# Altium PCB DE-010824.PcbDoc (part 2 of 2)
Units mil, origin at the board's own origin, x right, y up, seen from the top; angles counter-clockwise.
Board outline 4921.26 x 2755.91 mil, 3 copper layers (Top Layer, PWR, Bottom Layer), stack 19.217 mil thick; 221 components, 143 nets, 583 pads, 126 vias.
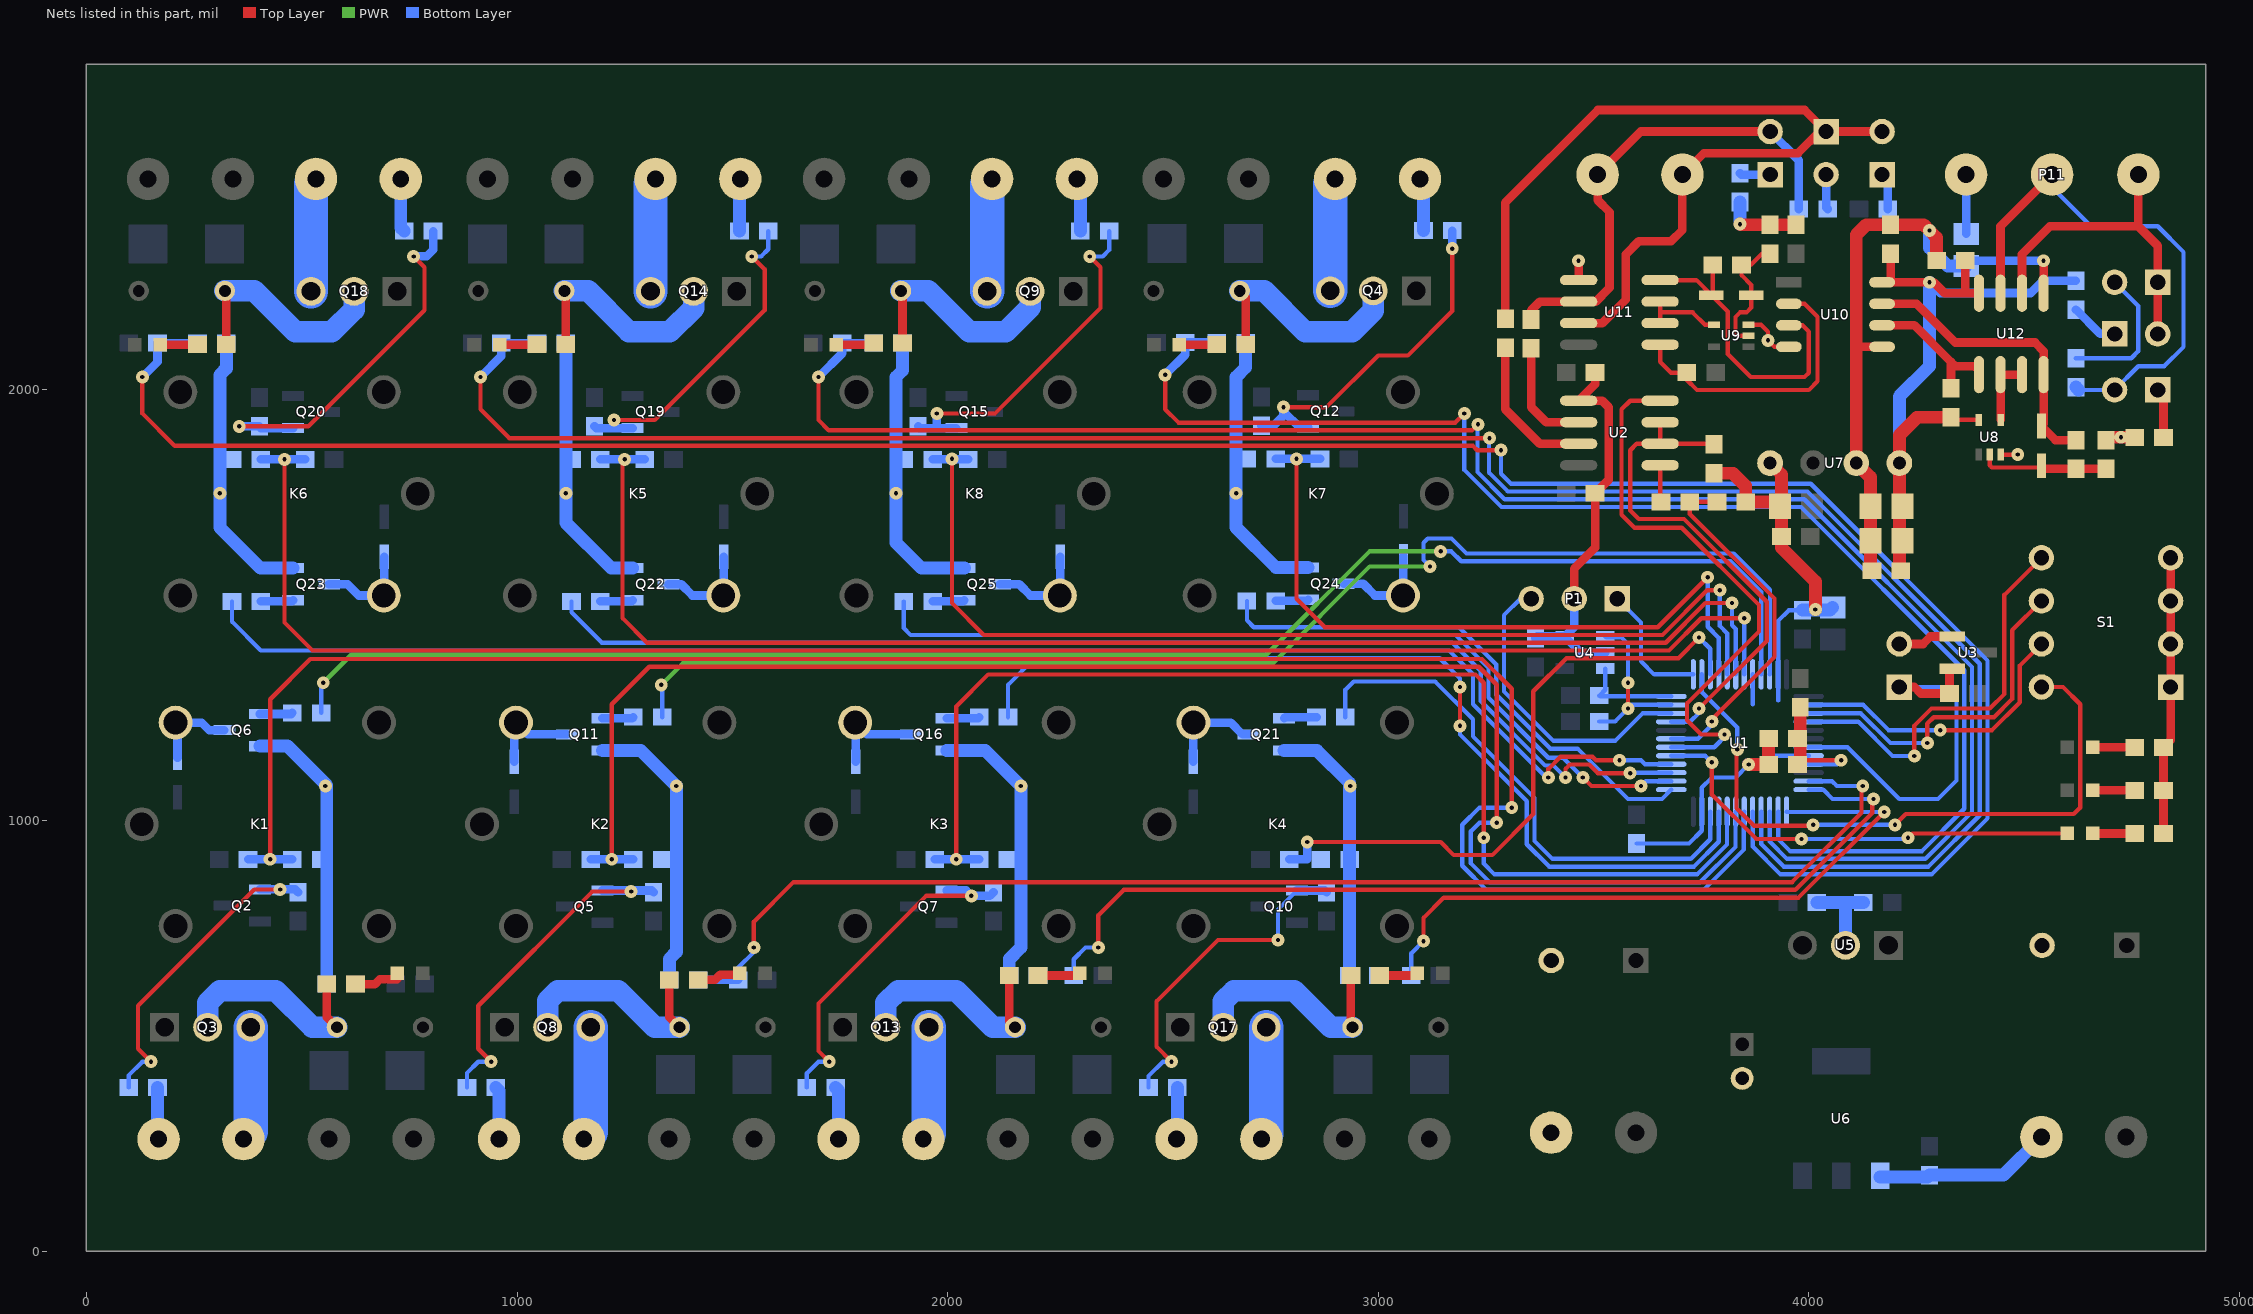
[diagram p3: the nets of this part, all layers, seen from the top]

## Via types
v1: diameter 30, hole 10, Top Layer to Bottom Layer, 126 vias

## Nets (pads, with @x,y where several pads share a name; then routed paths per layer and width w, separated by ;. In a path a pad name is that pad's centre, name@x,y a point inside that pad or via, vN(x,y) a via of type N, cw(c..) or ccw(c..) an arc to the next point about the centre after c; other vN are vias at no path point) (continued)
FB_DOOR_1: R35.2 R38.2 U1.11 | length 3113.5
  Top Layer w10: v1@1550,695 v1(1550,705) 1550,765 1642,857 3961.09,857 4122,1017.91 4122,1077 v1(4125,1080)
  Bottom Layer w10: R35.2@1513.68,630 1513.68,658.68 v1@1550,695 ; U1.11@3999.45,1091.42 4053.58,1091.42 4065,1080 v1(4125,1080)
  Bottom Layer w20: R38.2@1420.61,630 R35.2@1513.68,630
FB_DOOR_2: R44.2 R46.2 U1.12 | length 2352.9
  Top Layer w10: v1(2350,705) 2350,780 2409,839 3968.54,839 4147,1017.46 4147,1047 v1(4150,1050)
  Bottom Layer w10: R44.2@2293.07,640 2293.07,678.07 2320,705 v1(2350,705) ; U1.12@3999.45,1071.73 4033.27,1071.73 4055,1050 v1(4150,1050)
  Bottom Layer w20: R46.2@2210,640 R44.2@2293.07,640
FB_DOOR_3: R50.2 R53.2 U1.13 | length 1621.2
  Top Layer w10: v1(3105,720) 3105,774 3152,821 3976,821 v1(4175,1020)
  Bottom Layer w10: R50.2@3076.54,640 3076.54,691.54 v1(3105,720) ; U1.13@3948.27,1020.55 3948.82,1020 v1(4175,1020)
  Bottom Layer w20: R53.2@3000,640 R50.2@3076.54,640
FB_DOOR_4: R59.2 R61.2 U1.14 | length 3318.6
  Top Layer w10: v1(2505,2035) 2505,1955 2536,1924 3179,1924 v1(3200,1945)
  Bottom Layer w10: v1(3200,1945) 3200,1814.03 3286.03,1728 3982,1728 4361,1349 4361,1027.37 4262.63,929 3956.46,929 3928.58,956.87 U1.14@3928.58,1020.55
  Bottom Layer w20: v1(2505,2035) 2551.89,2081.89 R59.2@2551.89,2110 R61.2@2624.96,2110
FB_DOOR_5: R65.2 R70.2 U1.15 | length 4210.8
  Top Layer w10: v1(1700,2030) 1700,1930 1724,1906 3217.67,1906 v1(3231.67,1920) v1@3235,1920
  Bottom Layer w10: v1(3231.67,1920) 3230.33,1918.67 3230.33,1809.16 3293.49,1746 3989.46,1746 4379,1356.46 4379,1019.91 4270.09,911 3949,911 3908.9,951.1 U1.15@3908.9,1020.55
  Bottom Layer w20: v1(1700,2030) 1755.04,2085.04 R65.2@1755.04,2108.78 R70.2@1828.11,2108.78
FB_DOOR_6: R74.2 R76.2 U1.16 | length 5037.8
  Top Layer w10: v1(915,2030) 915,1955 982,1888 v1@3258,1888
  Bottom Layer w10: v1(3258.33,1888) 3257,1886.67 3257,1807.95 3300.95,1764 3996.91,1764 4397,1363.91 4397,1012.46 4277.54,893 3941.54,893 3889.21,945.33 U1.16@3889.21,1020.55
  Bottom Layer w20: v1(915,2030) 963.46,2078.46 R74.2@963.46,2108.78 R76.2@1046.54,2108.78
FB_DOOR_7: R80.2 R83.2 U1.17 | length 5899.4
  Top Layer w10: v1(130,2030) 130,1945 205,1870 3220,1870 3230,1860 v1(3285,1860)
  Bottom Layer w10: v1(3285,1860) 3285,1805.4 3308.4,1782 4004.37,1782 4415,1371.37 4415,1005 4285,875 3934.09,875 3869.53,939.56 U1.17@3869.53,1020.55
  Bottom Layer w20: v1(130,2030) 165.04,2065.04 R80.2@165.04,2108.78 R83.2@258.11,2108.78
FB_RD_0: R26.2 R28.2 U1.18 | length 4731.7
  Top Layer w10: v1(426.76,910) 426.76,1281.76 520,1375 3240.91,1375 3310,1305.91 v1(3310,1030)
  Bottom Layer w10: v1(3310,1030) 3235,1030 3195,990 3195,895 3251,839 3755.37,839 3849.06,932.7 3849.06,1019.77 U1.18@3849.84,1020.55
  Bottom Layer w20: R26.2@375.42,910 v1(426.76,910) R28.2@478.11,910
FB_RD_1: R34.2 R37.2 U1.19 | length 3779.3
  Top Layer w10: v1(1220,910) 1220,1270 1307,1357 3233.46,1357 3275,1315.46 v1(3275,995)
  Bottom Layer w10: v1(3275,995) 3235,995 3215,975 3215,900.46 3258.46,857 3747.91,857 3829.38,938.47 3829.38,1019.77 U1.19@3830.16,1020.55
  Bottom Layer w20: R34.2@1170.99,910 v1(1220,910) R37.2@1270.22,910
FB_RD_2: R43.2 R45.2 U1.20 | length 2821.6
  Top Layer w10: v1(2020,910) 2020,1265 2094,1339 3226,1339 3245,1320 v1(3245,960)
  Bottom Layer w10: v1(3245,960) 3245,900 3270,875 3740.46,875 3809.69,944.24 3809.69,1019.77 U1.20@3810.47,1020.55
  Bottom Layer w20: R43.2@1970.38,910 v1(2020,910) R45.2@2073.07,910
FB_RD_3: R49.2 R52.2 U1.39 | length 1476.5
  Top Layer w10: v1(2835,950) 3145,950 3175,920 3265,920 3360,1015 3360,1300 3437,1377 3697,1377 v1(3745,1425)
  Bottom Layer w10: v1(3745,1425) 3771.1,1398.9 U1.39@3771.1,1339.45
  Bottom Layer w20: R49.2@2793.46,910 2835,910 v1(2835,950)
FB_RD_4: R58.2 R60.2 U1.40 | length 1694.3
  Top Layer w10: v1(2810,1840) 2810,1515 2876,1449 3649,1449 v1(3765,1565)
  Bottom Layer w10: v1(3765,1565) 3765,1450 3790.79,1424.21 U1.40@3790.79,1339.45
  Bottom Layer w20: R60.2@2761.89,1840 v1(2810,1840) R58.2@2864.58,1840
FB_RD_5: R64.2 R69.2 U1.41 | length 2477.8
  Top Layer w10: v1(2010,1840) 2010,1505 2084,1431 3660.09,1431 3764.09,1535 v1(3793.33,1535)
  Bottom Layer w10: v1(3793.33,1535) 3793.33,1451.67 3810.47,1434.53 U1.41@3810.47,1339.45
  Bottom Layer w20: R69.2@1965.04,1838.78 R64.2@2048.11,1838.78
FB_RD_6: R73.2 R75.2 U1.42 | length 3281.4
  Top Layer w10: v1(1250,1838.78) 1245,1833.78 1245,1470 1302,1413 3667.54,1413 3759.54,1505 v1(3821.67,1505)
  Bottom Layer w10: v1(3821.67,1505) 3821.67,1453.33 3830.16,1444.84 U1.42@3830.16,1339.45
  Bottom Layer w20: R75.2@1193.46,1838.78 v1(1250,1838.78) R73.2@1296.54,1838.78
FB_RD_7: R79.2 R82.2 U1.43 | length 4060
  Top Layer w10: v1(460,1838.78) 460,1460 525,1395 3675,1395 3749.84,1469.84 v1@3849.84,1469.84
  Bottom Layer w10: U1.43@3849.84,1339.45 v1@3849.84,1469.84
  Bottom Layer w20: R82.2@405.04,1838.78 v1(460,1838.78) R79.2@508.11,1838.78
  other v1: 3850,1470
I2C_SCL: R11.1 U1.35 U4.1 | length 393
  Top Layer w10: v1(3580,1260) v1(3580,1320)
  Bottom Layer w10: R11.1@3513.46,1230 3550,1230 v1(3580,1260) 3588.58,1268.58 U1.35@3680.55,1268.58 ; U4.1@3527.24,1427.4 3529.65,1425 3565,1425 3580,1410 v1(3580,1320)
I2C_SDA: R12.1 U1.36 U4.3 | length 236.1
  Bottom Layer w10: U4.3@3527.24,1352.6 3527.24,1303.78 R12.1@3513.46,1290 3515.2,1288.27 U1.36@3680.55,1288.27
NetC11_1: C11.1 C12.1 L1.2 U1.9 | length 311.6
  Top Layer w10: C12.1@3973.46,1130 3980,1136.54 3983.46,1140 v1(4075,1140)
  Top Layer w30: C12.1@3980,1136.54 L1.2@3980,1263.07
  Bottom Layer w10: U1.9@3999.45,1130.79 4065.79,1130.79 v1(4075,1140)
NetC22_2: C22.2 D5.2 R17.1 U9.2 | length 303
  Top Layer w10: U9.2@3860,2125.59 3834.41,2125.59 3829.46,2130.54 3829.46,2169.46 3840,2180 3855,2180 3866.26,2191.26 D5.2@3866.26,2220 3866.26,2243.74 3843.46,2266.54 R17.1@3843.46,2290 3865,2290 3891.54,2316.54 C22.2@3910,2316.54
NetC23_2: C23.2 D6.2 R18.1 U8.2 | length 301.3
  Top Layer w10: U8.2@4420,1849.65 4420,1825 4425,1820 4536.26,1820 D6.2@4540,1823.74
  Top Layer w20: D6.2@4540,1823.74 4547.2,1816.54 C23.2@4690,1816.54
NetD1_2: D1.2 R1.2 | length 97
  Top Layer w20: D1.2@4659.53,970 R1.2@4756.54,970
NetD2_2: D2.2 R2.2 | length 97
  Top Layer w20: D2.2@4659.53,1070 R2.2@4756.54,1070
NetD3_2: D3.2 R4.2 | length 97
  Top Layer w20: D3.2@4659.53,1170 R4.2@4756.54,1170
NetD5_1: D5.1 R17.2 U10.3 U11.4 | length 719.6
  Top Layer w10: U11.4@3654.49,2255 3738.74,2255 D5.1@3773.74,2220 ; R17.2@3776.54,2290 3776.54,2222.8 D5.1@3773.74,2220 ; U10.3@3953.46,2150 3985,2150 4000,2135 4000,2040 3990,2030 3865,2030 3811.46,2083.54 3811.46,2182.28 D5.1@3773.74,2220
NetD6_1: D6.1 R18.2 U10.7 U12.4 | length 690
  Top Layer w20: U10.7@4170,2200 4250,2200 4340,2110 4525,2110 4545,2090 U12.4@4545,2035.51 4545,1921.26 D6.1@4540,1916.26 4572.8,1883.46 R18.2@4620,1883.46
NetD7_2: D7.2 R30.1 | length 101.9
  Top Layer w20: R30.1@625.04,620 670,620 681.75,631.75 D7.2@722.05,631.75
NetD9_2: D9.2 R31.1 | length 87
  Top Layer w20: D9.2@2537.95,2105 R31.1@2624.96,2105
NetD11_2: D11.2 K1.5 Q6.3 | length 203.3
  Bottom Layer w20: D11.2@211.57,1146.26 211.57,1223 K1.5@207.13,1227.44 267.56,1227.44 285,1210 Q6.3@320.24,1210
NetD12_2: D12.2 R41.1 | length 101.9
  Top Layer w20: R41.1@1420.61,630 1460,630 1471.75,641.75 D12.2@1517.62,641.75
NetD14_2: D14.2 R42.1 | length 88.6
  Top Layer w20: D14.2@1741.1,2105 1824.33,2105 R42.1@1828.11,2108.78
NetD16_2: D16.2 K2.5 Q11.3 | length 222.4
  Bottom Layer w20: D16.2@993.69,1136.26 993.69,1223.61 K2.5@997.52,1227.44 1024.96,1200 Q11.3@1115.81,1200
NetD17_2: D17.2 R54.1 | length 99.1
  Top Layer w20: R54.1@2210,640 2302.01,640 D17.2@2307.01,645
NetD19_2: D19.2 R55.1 | length 87
  Top Layer w20: D19.2@959.53,2105 R55.1@1046.54,2105
NetD21_2: D21.2 K3.5 Q16.3 | length 231.2
  Bottom Layer w20: K3.5@1785.28,1227.44 K3.5@1786.54,1226.18 ; D21.2@1786.54,1136.26 K3.5@1786.54,1226.18 ; Q16.3@1915.2,1200 1812.72,1200 K3.5@1786.54,1226.18
NetD22_2: D22.2 R67.1 | length 89.1
  Top Layer w20: R67.1@3003.46,640 3085.47,640 D22.2@3090.47,645
NetD24_2: D24.2 R68.1 | length 87
  Top Layer w20: D24.2@171.1,2105 R68.1@258.11,2105
NetD26_2: D26.2 K4.5 Q21.3 | length 230.7
  Bottom Layer w20: D26.2@2570,1136.26 2570,1226.5 K4.5@2570.94,1227.44 2657.56,1227.44 2685,1200 Q21.3@2698.66,1200
NetD27_2: D27.2 K5.5 Q22.3 | length 228.9
  Bottom Layer w20: Q22.3@1351.34,1548.78 1381.22,1548.78 1407.44,1522.56 K5.5@1479.06,1522.56 1480,1523.5 D27.2@1480,1612.52
NetD28_2: D28.2 K6.5 Q23.3 | length 228.9
  Bottom Layer w20: Q23.3@562.91,1548.78 606.22,1548.78 632.44,1522.56 K6.5@690.63,1522.56 691.57,1523.5 D28.2@691.57,1612.52
NetD29_2: D29.2 K7.5 Q24.3 | length 240.7
  Bottom Layer w20: Q24.3@2919.76,1550 2965,1550 2992.44,1522.56 K7.5@3057.48,1522.56 3058.43,1523.5 D29.2@3058.43,1613.74
NetD30_2: D30.2 K8.5 Q25.3 | length 240.3
  Bottom Layer w20: Q25.3@2121.57,1548.78 2166.22,1548.78 2192.44,1522.56 K8.5@2260.63,1522.56 2261.57,1523.5 D30.2@2261.57,1612.52
NetF1_1: F1.1 Q3.2 R30.2 | length 513.3
  Top Layer w20: R30.2@558.11,620 558.11,543.46 F1.1@581.57,520
  Bottom Layer w50: Q3.2@281.57,520 281.57,576.57 310,605 440,605 525,520 F1.1@581.57,520
NetF2_1: F2.1 Q4.2 R31.2 | length 546.6
  Top Layer w20: F2.1@2678.43,2230 2691.89,2216.54 R31.2@2691.89,2105
  Bottom Layer w50: F2.1@2678.43,2230 2735,2230 2830,2135 2940,2135 2988.43,2183.43 Q4.2@2988.43,2230
NetF3_1: F3.1 Q8.2 R41.2 | length 532
  Top Layer w20: R41.2@1353.68,630 1353.68,543.46 F3.1@1377.15,520
  Bottom Layer w50: Q8.2@1071.15,520 1071.15,581.15 1095,605 1235,605 1320,520 F3.1@1377.15,520
NetF4_1: F4.1 Q9.2 R42.2 | length 522.6
  Top Layer w20: F4.1@1891.57,2230 1895.04,2226.54 R42.2@1895.04,2108.78
  Bottom Layer w50: F4.1@1891.57,2230 1955,2230 2050,2135 2135,2135 2191.57,2191.57 Q9.2@2191.57,2228.78
NetF5_1: F5.1 Q13.2 R54.2 | length 529.1
  Top Layer w20: R54.2@2143.07,640 2143.07,533.46 F5.1@2156.54,520
  Bottom Layer w50: Q13.2@1856.54,520 1856.54,576.54 1885,605 2020,605 2105,520 F5.1@2156.54,520
NetF6_1: F6.1 Q14.2 R55.2 | length 527.3
  Top Layer w20: F6.1@1110,2230 1113.46,2226.54 R55.2@1113.46,2105
  Bottom Layer w50: F6.1@1110,2230 1165,2230 1260,2135 1355,2135 1410,2190 Q14.2@1410,2228.78
NetF7_1: F7.1 Q17.2 R67.2 | length 527
  Top Layer w20: R67.2@2936.54,640 2936.54,523.46 F7.1@2940,520
  Bottom Layer w50: Q17.2@2640,520 2640,580 2665,605 2805,605 2890,520 F7.1@2940,520
NetF8_1: F8.1 Q18.2 R68.2 | length 529.4
  Top Layer w10: F8.1@321.57,2230 F8.1@325.04,2226.54
  Top Layer w20: R68.2@325.04,2105 F8.1@325.04,2226.54
  Bottom Layer w50: F8.1@321.57,2230 390,2230 485,2135 570,2135 621.57,2186.57 Q18.2@621.57,2228.78
NetP3_1: P3.1 R9.1 U1.7 U3.2 | length 927.6
  Top Layer w20: P3.1@4210,1310 4245,1310 4260,1295 R9.1@4326.54,1295 4326.54,1346.54 U3.2@4332.6,1352.6
  Bottom Layer w10: U1.7@3999.45,1170.16 4089.84,1170.16 4210,1050 4300,1050 4343,1093 4343,1282 4315,1310 P3.1@4210,1310
NetP5_1: P5.1 R13.1 | length 113.4
  Bottom Layer w20: R13.1@4620,2186.54 4676.54,2130 P5.1@4710,2130
NetP5_2: P5.2 P9.1 P11.1 U12.6 | length 776.1
  Top Layer w20: U12.6@4495,2224.49 4495,2315 4560,2380 4765,2380 ; P11.1@4765,2500 4765,2380 ; P5.2@4810,2130 P9.1@4810,2250 4810,2335 4765,2380
NetP6_1: P6.1 R14.1 | length 85.6
  Bottom Layer w20: P6.1@4170,2500 4183.46,2486.54 R14.1@4183.46,2420
NetP7_1: P7.1 R15.1 | length 115.6
  Top Layer w20: P7.1@4810,2000 4823.46,1986.54 R15.1@4823.46,1890
NetP7_2: P7.2 P11.2 R19.1 U12.7 | length 1236.5
  Top Layer w20: U12.7@4445,2224.49 4445,2380 P11.2@4565,2500
  Bottom Layer w10: P11.2@4565,2500 4565,2470 4655,2380 4810,2380 4870,2320 4870,2100 4825,2055 4765,2055 P7.2@4710,2000 R19.1@4626.54,2000
  Bottom Layer w30: R19.1@4620,2006.54 R19.1@4626.54,2000
NetP8_1: P8.1 R16.1 | length 71.4
  Bottom Layer w20: R16.1@3840,2503.46 3843.46,2500 P8.1@3910,2500
NetP9_2: P9.2 R19.2 | length 334.6
  Bottom Layer w10: R19.2@4620,2073.46 4748.46,2073.46 4765,2090 4765,2195 P9.2@4710,2250
NetP10_2: P10.2 R20.2 | length 81.4
  Bottom Layer w20: P10.2@4040,2500 4040,2423.46 R20.2@4043.46,2420
NetP11_3: P11.3 R23.2 | length 137.6
  Bottom Layer w20: R23.2@4365,2362.4 P11.3@4365,2500
NetQ2_1: Q2.1 R24.1 R25.2 | length 768.8
  Top Layer w10: v1(150,440) 120,470 120,570 390,840 v1(450,840)
  Bottom Layer w10: R25.2@98.11,380 98.11,408.11 130,440 v1(150,440)
  Bottom Layer w20: Q2.1@402.91,840 v1(450,840) 485.04,840 R24.1@491.57,833.46
NetQ5_1: Q5.1 R32.1 R33.2 | length 828.4
  Top Layer w10: v1(940,440) 910,470 910,570 1175,835 v1(1265,835)
  Bottom Layer w10: R33.2@883.68,380 883.68,413.68 910,440 v1(940,440)
  Bottom Layer w20: Q5.1@1198.49,837.4 1313.21,837.4 R32.1@1317.15,833.46
NetQ6_1: Q6.1 R36.1 | length 76.3
  Bottom Layer w20: Q6.1@402.91,1247.4 475.51,1247.4 R36.1@478.11,1250
NetQ7_1: Q7.1 R39.1 R40.2 | length 817.4
  Top Layer w10: v1(1725,440) 1700,465 1700,575 1950,825 v1(2055,825)
  Bottom Layer w10: R40.2@1673.07,380 1673.07,413.07 1700,440 v1(1725,440)
  Bottom Layer w20: Q7.1@1997.87,837.4 2042.6,837.4 v1(2055,825) 2098.07,825 R39.1@2106.54,833.46
NetQ10_1: Q10.1 R47.1 R48.2 | length 792.9
  Top Layer w10: v1(2520,440) 2485,475 2485,580 2627.75,722.75 v1(2767.25,722.75)
  Bottom Layer w10: R48.2@2466.54,380 2466.54,406.54 2500,440 v1(2520,440) ; v1(2767.25,722.75) 2767.25,793.32 Q10.1@2811.34,837.4
  Bottom Layer w20: Q10.1@2811.34,837.4 2876.06,837.4 R47.1@2880,833.46
NetQ11_1: Q11.1 R51.1 | length 72.8
  Bottom Layer w20: Q11.1@1198.49,1237.4 1267.62,1237.4 R51.1@1270.22,1240
NetQ12_1: Q12.1 R56.1 R57.2 | length 825.1
  Top Layer w10: v1(2780,1960) 2880,1960 3000,2080 3068.78,2080 3171.89,2183.11 v1(3171.89,2328.11)
  Bottom Layer w20: R56.1@2728.43,1916.54 2756.54,1916.54 2780,1940 v1@2780,1950 ; v1(2780,1960) v1@2780,1950 ; Q12.1@2837.09,1912.6 2817.4,1912.6 v1@2780,1950 ; v1(3171.89,2328.11) R57.2@3171.89,2370
NetQ15_1: Q15.1 R62.1 R63.2 | length 830.8
  Top Layer w10: v1(1975,1945) 2110,1945 2355,2190 2355,2285 v1(2330,2310)
  Bottom Layer w10: v1(2330,2310) 2360,2310 2375.04,2325.04 R63.2@2375.04,2368.78
  Bottom Layer w20: R62.1@1931.57,1915.32 1935.51,1911.38 1975,1911.38 ; v1(1975,1945) 1975,1911.38 ; Q15.1@2020.24,1911.38 1975,1911.38
NetQ16_1: Q16.1 R66.1 | length 76.3
  Bottom Layer w20: Q16.1@1997.87,1237.4 2070.47,1237.4 R66.1@2073.07,1240
NetQ19_1: Q19.1 R71.1 R72.2 | length 789.5
  Top Layer w10: v1(1225,1930) 1320,1930 1575,2185 1575,2280 v1(1545,2310)
  Bottom Layer w10: v1(1545,2310) 1566.93,2310 1583.46,2326.54 R72.2@1583.46,2368.78
  Bottom Layer w20: R71.1@1180,1915.32 1183.94,1911.38 1225,1911.38 ; v1(1225,1930) 1225,1911.38 ; Q19.1@1268.66,1911.38 1225,1911.38
NetQ20_1: Q20.1 R77.1 R78.2 | length 898.9
  Top Layer w10: v1(355,1915.32) 515.32,1915.32 785,2185 785,2285 v1(760,2310)
  Bottom Layer w20: v1(355,1915.32) R77.1@401.57,1915.32 405.51,1911.38 Q20.1@480.24,1911.38 ; v1(760,2310) 790,2310 805.04,2325.04 R78.2@805.04,2368.78
NetQ21_1: Q21.1 R81.1 | length 76.3
  Bottom Layer w20: Q21.1@2781.34,1237.4 2783.94,1240 R81.1@2856.54,1240
NetQ22_1: Q22.1 R84.1 | length 76.3
  Bottom Layer w20: R84.1@1193.46,1508.78 1266.06,1508.78 Q22.1@1268.66,1511.38
NetQ23_1: Q23.1 R85.1 | length 76.3
  Bottom Layer w20: R85.1@405.04,1508.78 477.64,1508.78 Q23.1@480.24,1511.38
NetQ24_1: Q24.1 R86.1 | length 76.3
  Bottom Layer w20: R86.1@2761.89,1510 2834.49,1510 Q24.1@2837.09,1512.6
NetQ25_1: Q25.1 R87.1 | length 74.9
  Bottom Layer w20: R87.1@1965.04,1508.78 2036.3,1508.78 Q25.1@2038.9,1511.38
NetR5_2: R5.2 U2.6 | length 261.5
  Top Layer w20: R5.2@3355,2096.54 3355,1960 3390,1925 U2.6@3465.51,1925
NetR6_2: R6.2 U2.7 | length 346.7
  Top Layer w20: R6.2@3295,2098.07 3295,1955 3375,1875 U2.7@3465.51,1875
NetR7_2: R7.2 U2.1 | length 85.8
  Top Layer w10: U2.1@3654.49,1825 3654.49,1742.05 R7.2@3656.54,1740
NetR21_1: R21.1 U10.2 U11.1 | length 679.1
  Top Layer w10: U11.1@3654.49,2105 3654.49,2065.51 3680,2040 R21.1@3716.54,2040 3716.54,2023.46 3740,2000 4000,2000 4020,2020 4020,2170 3990,2200 U10.2@3953.46,2200
NetR22_1: R22.1 U10.6 U12.1 | length 339.5
  Top Layer w20: U10.6@4170,2150 4245,2150 4330,2065 ; R22.1@4330,2003.46 4330,2065 ; U12.1@4395,2035.51 4395,2045 4385,2055 4340,2055 4330,2065
NetS1_5: S1.5 U1.4 | length 939.9
  Top Layer w10: v1(4245,1150) 4245,1220.46 4284.54,1260 4420,1260 4454,1294 4454,1524 S1.5@4540,1610
  Bottom Layer w10: U1.4@3999.45,1229.21 4114.88,1229.21 4194.09,1150 v1(4245,1150)
NetS1_6: S1.6 U1.3 | length 830.9
  Top Layer w10: v1(4275,1180) 4275,1225 4290,1240 4430,1240 4472,1282 4472,1442 S1.6@4540,1510
  Bottom Layer w10: U1.3@3999.45,1248.9 4120.65,1248.9 4189.54,1180 v1(4275,1180) v1@4280,1180
NetS1_7: S1.7 U1.2 | length 692.7
  Top Layer w10: v1(4305,1210) 4425.46,1210 4490,1274.54 4490,1360 S1.7@4540,1410
  Bottom Layer w10: U1.2@3999.45,1268.58 4126.42,1268.58 4185,1210 v1@4300,1210
NetS1_8: S1.8 U1.38 | length 1524.5
  Top Layer w10: v1(3833.75,1165) 3832,1163.25 3832,1028.46 3872.46,988 4008,988 v1(4010,990) ; v1(4200,990) 4225,1015 4615,1015 4630,1030 4630,1270 4590,1310 S1.8@4540,1310
  Bottom Layer w10: U1.38@3751.42,1339.45 3751.42,1298.58 3833.75,1216.25 v1(3833.75,1165) ; v1(4010,990) v1(4200,990)
NetU8_4: U8.4 U12.2 U12.3 | length 155.4
  Top Layer w20: U8.4@4445.59,1930.35 4445.59,2034.92 U12.2@4445,2035.51 U12.3@4495,2035.51
NetU9_4: U9.4 U11.2 U11.3 | length 186.7
  Top Layer w10: U11.2@3654.49,2155 3654.49,2180 ; U11.3@3654.49,2205 3654.49,2180 ; U9.4@3779.29,2151.18 3758.82,2151.18 3730,2180 3654.49,2180
PWR_0: R36.2 U1.45 | length 3768
  PWR w10: v1(550,1320) 615,1385 2740,1385 2980,1625 v1(3145,1625)
  Bottom Layer w10: R36.2@545.04,1250 545.04,1315.04 v1(550,1320) ; v1(3145,1625) 3169.54,1625 3192.54,1602 3818,1602 3889.21,1530.79 U1.45@3889.21,1339.45
PWR_1: R51.2 U1.46 | length 3092.1
  PWR w10: v1(1335,1315) 1385,1365 2755,1365 2980,1590 v1(3120,1590)
  Bottom Layer w10: R51.2@1337.15,1240 v1@1337.15,1317.15 ; v1(3120,1590) 3105,1605 3105,1645 3115,1655 3170,1655 3205,1620 3825.46,1620 3909.68,1535.78 3909.68,1340.23 U1.46@3908.9,1339.45
PWR_2: R66.2 U1.21 | length 2181.5
  Top Layer w10: v1(3190,1220) v1(3190,1310)
  Bottom Layer w10: R66.2@2140,1240 2140,1315 2202,1377 3143,1377 3190,1330 v1(3190,1310) ; v1(3190,1220) 3190,1200 3345,1045 3345,945 3397,893 3733,893 3790.79,950.79 U1.21@3790.79,1020.55 U1.21@3790.01,1019.77
PWR_3: R81.2 U1.22 | length 1254.5
  Bottom Layer w10: R81.2@2923.46,1240 2923.46,1303.46 2943,1323 3132,1323 3220,1235 3220,1195.46 3363,1052.46 3363,952.46 3404.46,911 3725.54,911 3771.1,956.56 U1.22@3771.1,1020.55
PWR_4: R86.2 U1.25 | length 1252.5
  Bottom Layer w10: R86.2@2694.96,1510 2694.96,1465.04 2711,1449 3187.36,1449 3274,1362.36 3274,1292.37 3399.37,1167 3463,1167 3580,1050 3658.82,1050 U1.25@3680.55,1071.73
PWR_5: R87.2 U1.26 | length 2041.8
  Top Layer w10: v1(3475,1100) 3495,1080 v1(3610,1080)
  Bottom Layer w10: R87.2@1898.11,1508.78 1898.11,1446.89 1914,1431 3179.51,1431 3256,1354.51 3256,1284.91 3394.91,1146 3429,1146 v1(3475,1100) ; v1(3610,1080) 3621.42,1091.42 U1.26@3680.55,1091.42
PWR_6: R84.2 U1.27 | length 2811.8
  Top Layer w10: v1(3435,1100) 3435,1120 3445,1130 3490,1130 3510,1110 v1(3585,1110)
  Bottom Layer w10: R84.2@1126.54,1508.78 1126.54,1483.46 1197,1413 3172.05,1413 3238,1347.05 3238,1277.46 3387.46,1128 3406.6,1128 3434.6,1100 v1(3435,1100) ; v1(3585,1110) 3586.1,1111.1 U1.27@3680.55,1111.1
PWR_7: R85.2 U1.28 | length 3618.7
  Top Layer w10: v1(3395,1100) 3395,1120 3423,1148 3497.46,1148 3505.46,1140 v1(3560,1140)
  Bottom Layer w10: R85.2@338.11,1508.78 338.11,1461.89 405,1395 3164.6,1395 3220,1339.6 3220,1270 3390,1100 v1(3395,1100) ; v1(3560,1140) 3610,1140 3619.21,1130.79 U1.28@3680.55,1130.79
RD_0: P14.2 R25.1 | length 125
  Bottom Layer w20: R25.1@165.04,380 R25.1@167.76,377.28
  Bottom Layer w30: R25.1@165.04,380 165.04,262.72 P14.2@167.76,260
RD_1: P16.2 R33.1 | length 123.1
  Bottom Layer w30: R33.1@950.61,380 958.15,372.46 P16.2@958.15,260
RD_2: P18.2 R40.1 | length 122.7
  Bottom Layer w30: R40.1@1740,380 1746.54,373.46 P18.2@1746.54,260
RD_3: P20.2 R48.1 | length 120.8
  Bottom Layer w30: P20.2@2531.57,260 2533.46,261.89 R48.1@2533.46,380
RD_4: P22.2 R57.1 | length 123.4
  Bottom Layer w30: P22.2@3096.85,2490 3104.96,2481.89 R57.1@3104.96,2370
RD_5: P24.2 R63.1 | length 124.6
  Bottom Layer w30: P24.2@2300,2490 2308.11,2481.89 R63.1@2308.11,2368.78
RD_6: P26.2 R72.1 | length 122
  Bottom Layer w30: R72.1@1516.54,2368.78 1516.54,2488.11 P26.2@1518.43,2490
RD_7: P28.2 R78.1 | length 124.6
  Bottom Layer w30: P28.2@730,2490 730,2376.89 R78.1@738.11,2368.78
RS485_DE: R3.2 U1.33 U2.2 U2.3 | length 1192.8
  Top Layer w10: U2.3@3654.49,1925 U2.2@3654.49,1875 ; v1(3745,1260) 3902,1417 3902,1508 3710,1700 3605,1700 3585,1720 3585,1860 3600,1875 U2.2@3654.49,1875 ; R3.2@3780,1873.46 3778.46,1875 U2.2@3654.49,1875
  Bottom Layer w10: U1.33@3680.55,1229.21 3724.21,1229.21 3745,1250 v1(3745,1260)
RSA: P8.2 P12.2 R5.1 R20.1 U11.6 | length 1149
  Top Layer w20: R5.1@3355,2163.46 3355,2185 3375,2205 U11.6@3465.51,2205 3505,2205 3537,2237 3537,2413 3509.49,2440.51 P12.2@3509.49,2500 3609.49,2600 P8.2@3910,2600
  Bottom Layer w20: P8.2@3910,2600 3976.54,2533.46 R20.1@3976.54,2420
RSB: P6.2 P10.1 P12.1 R6.1 U11.7 | length 2150.5
  Top Layer w20: R6.1@3295,2165 3295,2435 3510,2650 3990,2650 P10.1@4040,2600 ; U11.7@3465.51,2155 3520,2155 3575,2210 3575,2315 3605,2345 3680,2345 3706.34,2371.34 P12.1@3706.34,2500 3756.34,2550 3975,2550 4025,2600 P10.1@4040,2600 ; P6.2@4170,2600 P10.1@4040,2600
STATUS_LED: D1.1 U1.29 | length 1049.1
  Top Layer w10: v1(3774.58,1135) 3774.58,1060.42 3878,957 v1(3983,957) ; v1(4230,960) 4240,970 D1.1@4600.47,970
  Bottom Layer w10: U1.29@3680.55,1150.47 3759.11,1150.47 v1(3774.58,1135) ; v1(3983,957) 4227,957 v1(4230,960)
SWCLK: P1.1 U1.37 | length 302.2
  Bottom Layer w10: P1.1@3555,1515 3610,1460 3610,1370 3640.55,1339.45 U1.37@3731.73,1339.45
SWDIO: P1.3 U1.34 | length 718.5
  Bottom Layer w10: P1.3@3355,1515 3330,1515 3292,1477 3292,1299.82 3406.82,1185 3550,1185 3613.9,1248.9 U1.34@3680.55,1248.9
USART_RX: R7.1 R8.1 U1.31 | length 830
  Top Layer w10: v1@3782.5,1230 3782.5,1242.5 3920,1380 3920,1515.46 3723.46,1711.99 R7.1@3723.46,1740 R8.1@3786.54,1740
  Bottom Layer w10: U1.31@3680.55,1189.84 3742.34,1189.84 v1@3782.5,1230
  other v1: 3774.58,1230
USART_TX: U1.30 U2.4 | length 1333.7
  Top Layer w10: U2.4@3654.49,1975 3585,1975 3565,1955 3565,1710 3595,1680 3704.54,1680 3884,1500.54 3884,1439 3717,1272 3717,1233 3750,1200 v1(3804.17,1200) v1@3810,1200
  Bottom Layer w10: U1.30@3680.55,1170.16 3780.16,1170.16 v1@3810,1200
VDD2: C15.2 C16.2 C17.2 C20.2 C21.1 R13.2 R22.2 U7.4 U8.5 U10.8 U12.8 | length 1712.1
  Top Layer w10: R22.2@4330,1936.54 4336.18,1930.35 U8.5@4394.41,1930.35
  Top Layer w20: U10.8@4170,2250 U10.8@4185,2250 ; C20.2@4190,2316.54 4190,2255 U10.8@4185,2250 ; C21.1@4363.46,2300 4363.46,2226.02 4365,2224.49 ; U12.8@4395,2224.49 4365,2224.49 ; U10.8@4185,2250 v1(4280,2250) 4290,2250 4315.51,2224.49 4365,2224.49
  Top Layer w30: C17.2@4213.46,1580 4210,1583.46 4210,1730 U7.4@4210,1830 4210,1895 4251.54,1936.54 R22.2@4330,1936.54
  Bottom Layer w20: v1(4280,2250) 4305,2225 4515,2225 4543.46,2253.46 R13.2@4620,2253.46
  Bottom Layer w30: U7.4@4210,1830 4210,1985 4280,2055 v1(4280,2250)
VSS: C1.2 C2.2 C3.2 C4.2 C5.1 C6.1 C7.1 C8.1 C9.2 C10.2 C11.2 C12.2 C13.1 C14.1 C18.2 C19.1 C22.1 C24.1 P1.2 P2.1 P3.2 P4.1 P14.1 P16.1 P18.1 P20.1 P22.1 P24.1 P26.1 P28.1 Q3.3 Q4.3 Q6.2 Q8.3 Q9.3 Q11.2 Q13.3 Q14.3 Q16.2 Q17.3 Q18.3 Q21.2 Q22.2 Q23.2 Q24.2 Q25.2 R1.1 R2.1 R3.1 R4.1 R8.2 R16.2 R28.1 R29.1 R37.1 R38.1 R45.1 R46.1 R52.1 R53.1 R60.1 R61.1 R69.1 R70.1 R75.1 R76.1 R82.1 R83.1 S1.1 S1.2 S1.3 S1.4 U1.8 U1.23 U1.44 U1.47 U2.5 U3.1 U4.2 U4.5 U5.2 U6.1 U7.1 U9.3 U10.4 U11.5 | length 11525.1
  Top Layer w10: U9.3@3860,2151.18 3888.82,2151.18 3905,2135 v1(3905,2115) 3920,2100 U10.4@3953.46,2100
  Top Layer w20: P1.2@3455,1515 3455,1585 3503.46,1633.46 C1.2@3503.46,1760 3535,1791.54 3535,1960 3520,1975 U2.5@3465.51,1975 3503.46,2012.95 C18.2@3503.46,2040 ; v1(3465,2300) 3465.51,2299.49 U11.5@3465.51,2255 ; P3.2@4210,1410 4265,1410 4282.4,1427.4 U3.1@4332.6,1427.4 ; R1.1@4823.46,970 R2.1@4823.46,1070 R4.1@4823.46,1170 4840,1186.54 S1.1@4840,1310 S1.2@4840,1410 S1.3@4840,1510 S1.4@4840,1610
  Top Layer w30: R3.1@3780,1806.54 3823.46,1806.54 3853.46,1776.54 R8.2@3853.46,1740 3922.6,1740 C13.1@3932.6,1730 ; v1(3840,2385) 3841.54,2383.46 C22.1@3910,2383.46 C19.1@3970,2383.46 ; v1(3860,1130) C12.2@3906.54,1130 C11.2@3906.54,1190 ; U7.1@3910,1830 3936.54,1803.46 C14.1@3936.54,1660 3936.54,1633.46 4015,1555 v1(4015,1490)
  Bottom Layer w10: C10.2@3600,946.54 3721.54,946.54 3751.42,976.42 U1.23@3751.42,1020.55 3751.42,1076.42 3775,1100 3830,1100 v1(3860,1130) v1@3860,1140.47 ; 3869.53,1270 U1.44@3869.53,1339.45 ; 3920.47,1150.47 U1.8@3999.45,1150.47 ; 3928.58,1278.58 U1.47@3928.58,1339.45 3928.58,1463.58 3953.46,1488.46 C9.2@3985,1488.46
  Bottom Layer w20: C24.1@3365,1423.46 3368.94,1427.4 U4.5@3432.76,1427.4 ; P1.2@3455,1515 3455,1449.65 U4.5@3432.76,1427.4 ; U4.2@3527.24,1390 3470.16,1390 U4.5@3432.76,1427.4
  Bottom Layer w30: R83.1@325.04,2108.78 325.04,2050.04 310,2035 v1(310,1760) 310,1680 403.82,1586.18 Q23.2@480.24,1586.18 ; Q6.2@402.91,1172.6 467.4,1172.6 558.11,1081.89 R29.1@558.11,620 ; R76.1@1113.46,2108.78 v1(1113.46,1760) 1113.46,1691.54 1218.82,1586.18 Q22.2@1268.66,1586.18 ; Q11.2@1198.49,1162.6 1287.4,1162.6 v1(1370,1080) 1370,695 1353.69,678.69 R38.1@1353.69,630 ; R70.1@1895.04,2108.78 1895.04,2045.04 1880,2030 v1(1880,1760) 1880,1645 1938.82,1586.18 Q25.2@2038.9,1586.18 ; Q16.2@1997.87,1162.6 2087.4,1162.6 v1(2170,1080) 2170,705 2143.07,678.07 R46.1@2143.07,640 ; R61.1@2691.89,2110 2691.89,2051.89 2670,2030 v1(2670,1760) 2670,1680 2762.6,1587.4 Q24.2@2837.09,1587.4 ; Q21.2@2781.34,1162.6 2857.4,1162.6 2933.07,1086.93 R53.1@2933.07,640 ; v1(3840,2385) R16.2@3840,2436.54 ; C9.2@3985,1488.46 4048.66,1488.46 C8.1@4055,1494.8 ; C6.1@4018.46,810 4085,810 ; U5.2@4085,710 4085,810 ; C5.1@4126.54,810 4085,810 ; U6.1@4165.55,172.13 4275.59,172.13 C7.1@4280,176.54 4451.54,176.54 P4.1@4540,265
  Bottom Layer w50: P14.1@364.61,260 P14.1@381.57,276.96
  Bottom Layer w80: P14.1@381.57,276.96 Q3.3@381.57,520 ; Q18.3@521.57,2228.78 521.57,2478.43 P28.1@533.15,2490 ; P16.1@1155,260 1171.15,276.15 Q8.3@1171.15,520 ; Q14.3@1310,2228.78 1310,2478.43 P26.1@1321.57,2490 ; P18.1@1943.39,260 1956.54,273.15 Q13.3@1956.54,520 ; Q9.3@2091.57,2228.78 2091.57,2478.43 P24.1@2103.15,2490 ; P20.1@2728.43,260 2740,271.57 Q17.3@2740,520 ; Q4.3@2888.43,2230 2888.43,2478.43 P22.1@2900,2490
  other v1: 555,1080 2935,1080
VSS2: C15.1 C16.1 C17.1 C20.1 C21.2 C23.1 R15.2 R23.1 U7.3 U8.3 U10.5 U12.5 | length 1631.4
  Top Layer w10: U8.3@4445.59,1849.65 4484.65,1849.65 v1(4485,1850)
  Top Layer w20: 4110,2095 4115,2100 U10.5@4170,2100 ; U12.5@4545,2224.49 v1(4545,2300)
  Top Layer w30: C17.1@4146.54,1580 4142.6,1583.94 C16.1@4142.6,1650 C15.1@4142.6,1730 4142.6,1797.4 U7.3@4110,1830 4110,2095 4110,2360 4133.46,2383.46 C20.1@4190,2383.46 4266.54,2383.46 v1(4280,2370) 4296.54,2353.46 C21.2@4296.54,2300 ; C23.1@4690,1883.46 4696.54,1890 v1(4725,1890) R15.2@4756.54,1890
  Bottom Layer w20: R23.1@4365,2287.6 4377.4,2300 v1(4545,2300)
  Bottom Layer w30: v1(4280,2370) 4280,2330 4322.4,2287.6 R23.1@4365,2287.6
pads on no net: K1.3 K2.3 K3.3 K4.3 K5.3 K6.3 K7.3 K8.3 U1.32 U8.1 U9.1

## Polygon pours and split planes (outlines as drawn)
VSS on PWR "Bottom Layer-No Net" (solid, remove dead copper, pour order 2): -3.01,6.75 4906.99,6.75 4911.99,1.75 4918.25,8.01 4918.25,1691.75 4516.99,1691.75 4486.99,1661.75 4486.99,1551.75 4436.99,1501.75 4086.99,1501.75 4041.99,1546.75 4041.99,2396.75 4096.99,2451.75 4115,2451.75 4115,2751.75 -3.01,2751.75
VSS2 on PWR "Bottom Layer-No Net" (solid, remove dead copper, pour order 0): 4921.26,2755.91 4921.26,1750 4455,1750 4435,1730 4440,1725 4440,1575 4400,1535 4115,1535 4075,1575 4075,2355 4125,2405 4240,2405 4260,2425 4260,2755 4920.35,2755

## Keep-outs
Keep-Out Layer:
  the board outline again, w10
Mechanical 1:
  lines w10: 0,2755.91 4921.26,2755.91 ; 0,2952.76 0,0 4921.26,0 4921.26,2952.76

## Other copper
Top Layer:
  rectangle net 3V3: 3910,235 4430,615
Bottom Layer:
  rectangle net 3V3: 3910,240 4430,615
  rectangle net VSS: 3825,1075 3885,1135
  rectangle net VSS: 3860,1075 3950,1290

## Silkscreen, mask and mechanical layers (free items; w line width, h text height)
Top Overlay:
  lines w10: 4240,2755.91 4240,2430 4230,2420 4110,2420 4060,2370 4060,1580 4110,1530 4400,1530 4445,1575 4445,1730 4475,1760 4910,1760
  text "RD7 GND 12V COIL" at 770,2725 h45 r180
  text "RD6 GND 12V COIL" at 1550,2725 h45 r180
  text "RD5 GND 12V COIL" at 2335,2725 h45 r180
  text "RD4 GND 12V COIL" at 3130,2725 h45 r180
  text "B RS485 A" at 3785,2725 h40 r180
  text "BIAS TERM BIAS" at 4225,2725 h28 r180
  text "A RS485 B GND" at 4835,2725 h40 r180
  text "--BIAS-- TERM." at 4905,1940 h28 r90
  text "ICSP" at 3310,1580 h40
  text "Sarajevo, FBiH, Bosna i Hercegovina   AUG. 2024." at 1045,1355 h40
  text "DE-010824" at 95,1345 h60
  text "ADDRESS" at 4700,1320 h40 r90
  text "A0 A1 A2 A3" at 4495,1300 h30 r90
  text "RESTART" at 4140,1265 h30 r90
  text "ERROR" at 4340,1145 h45
  text "RX-TX" at 4340,1050 h45
  text "STATUS" at 4295,945 h45
  text "iMEDIA" at 3955,270 h60
  text "www.imedia.ba" at 3765,155 h50
  text "RD0 GND 12V COIL" at 140,35 h45
  text "RD1 GND 12V COIL" at 920,35 h45
  text "RD2 GND 12V COIL" at 1710,35 h45
  text "RD3 GND 12V COIL" at 2485,35 h45
  text "GND 12V" at 3340,35 h45
  text "PWR" at 3700,35 h45
  text "AKU" at 4325,35 h45
  text "GND 12V" at 4500,35 h45

## Dimensions
4921.26,2755.91 to 4921.26,0 on Mechanical 1
0,2755.91 to 4921.26,2755.91 on Mechanical 1

## Text inside footprints (layer, text, board x,y; h text height)
C2: Top Overlay "+" at 4894.53,739.53 h10 r180
C3: Top Overlay "+" at 3754.53,704.53 h10 r180
C4: Top Overlay "+" at 3815.47,597.13 h10 r270